# Altium PCB w43TrafficLight_PCB.PcbDoc
Units mil, origin at the board's own origin, x right, y up, seen from the top; angles counter-clockwise.
Board outline 6000 x 4000 mil, 2 copper layers (Top Layer, Bottom Layer); 41 components, 58 nets, 217 pads, 0 vias.
Unrouted connection lines stored in the file: 82.
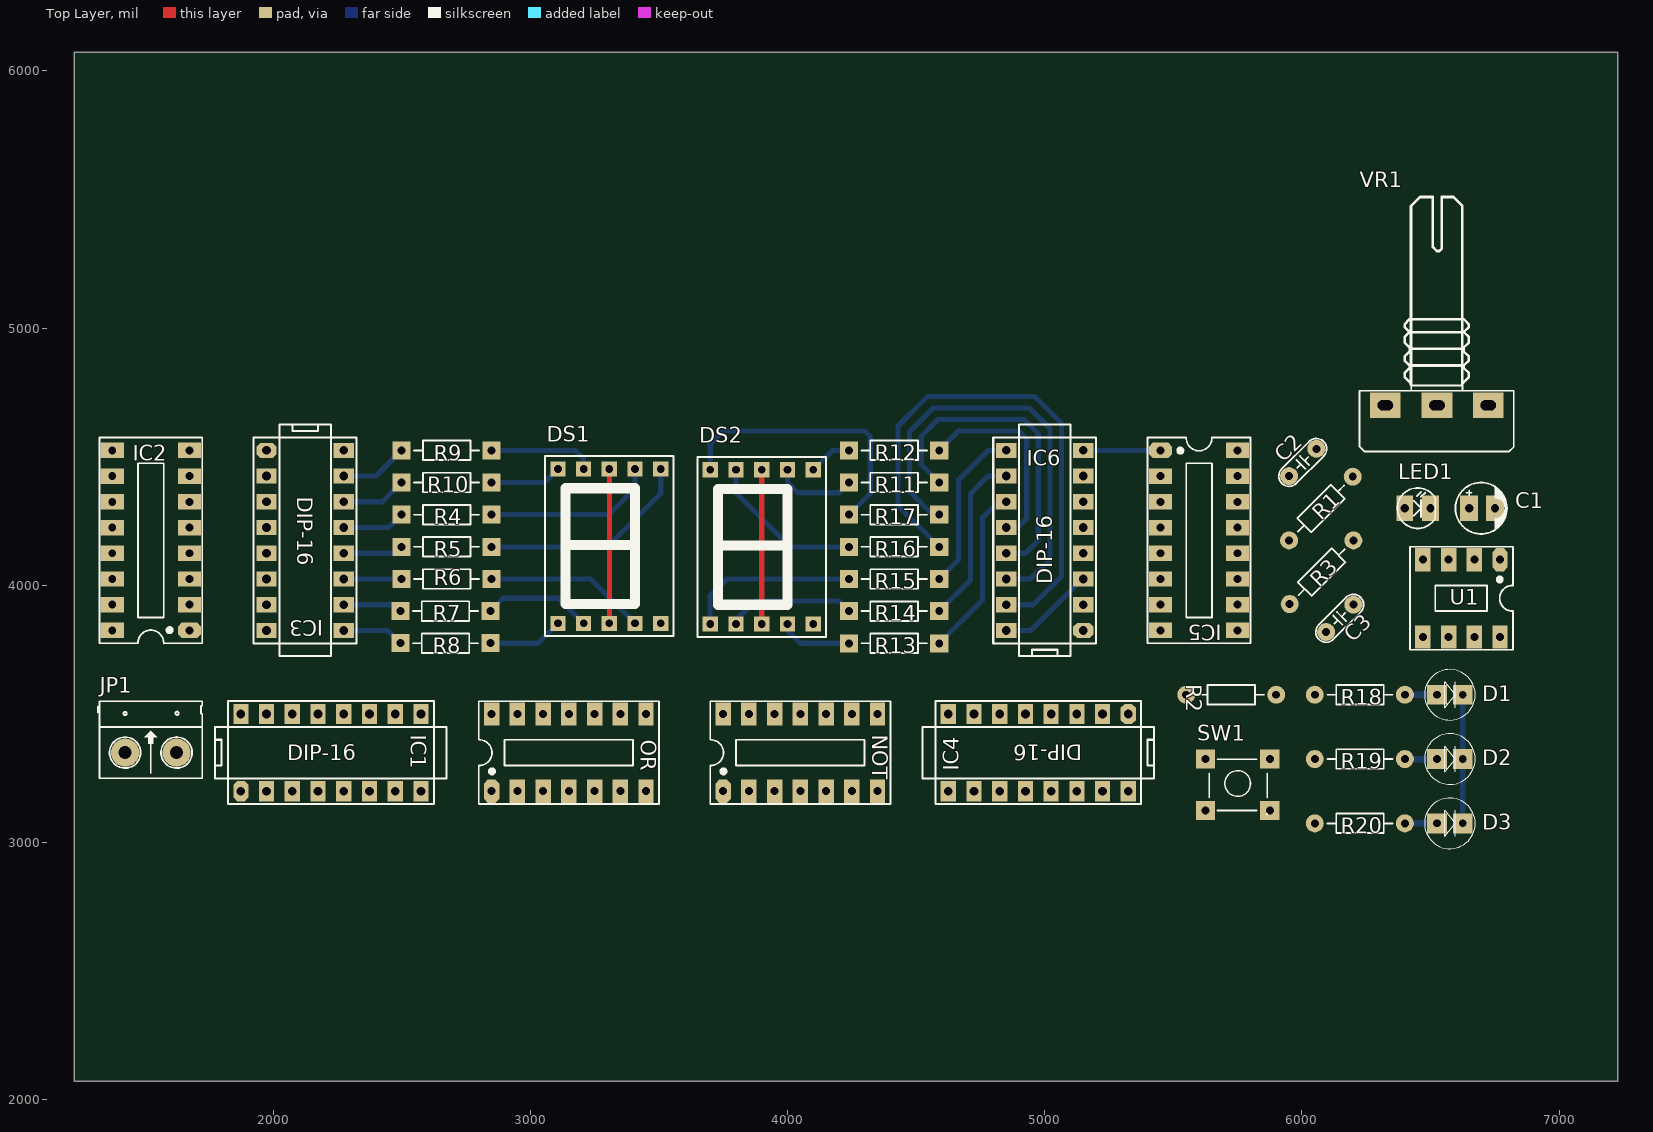
[diagram p0: Top Layer view]
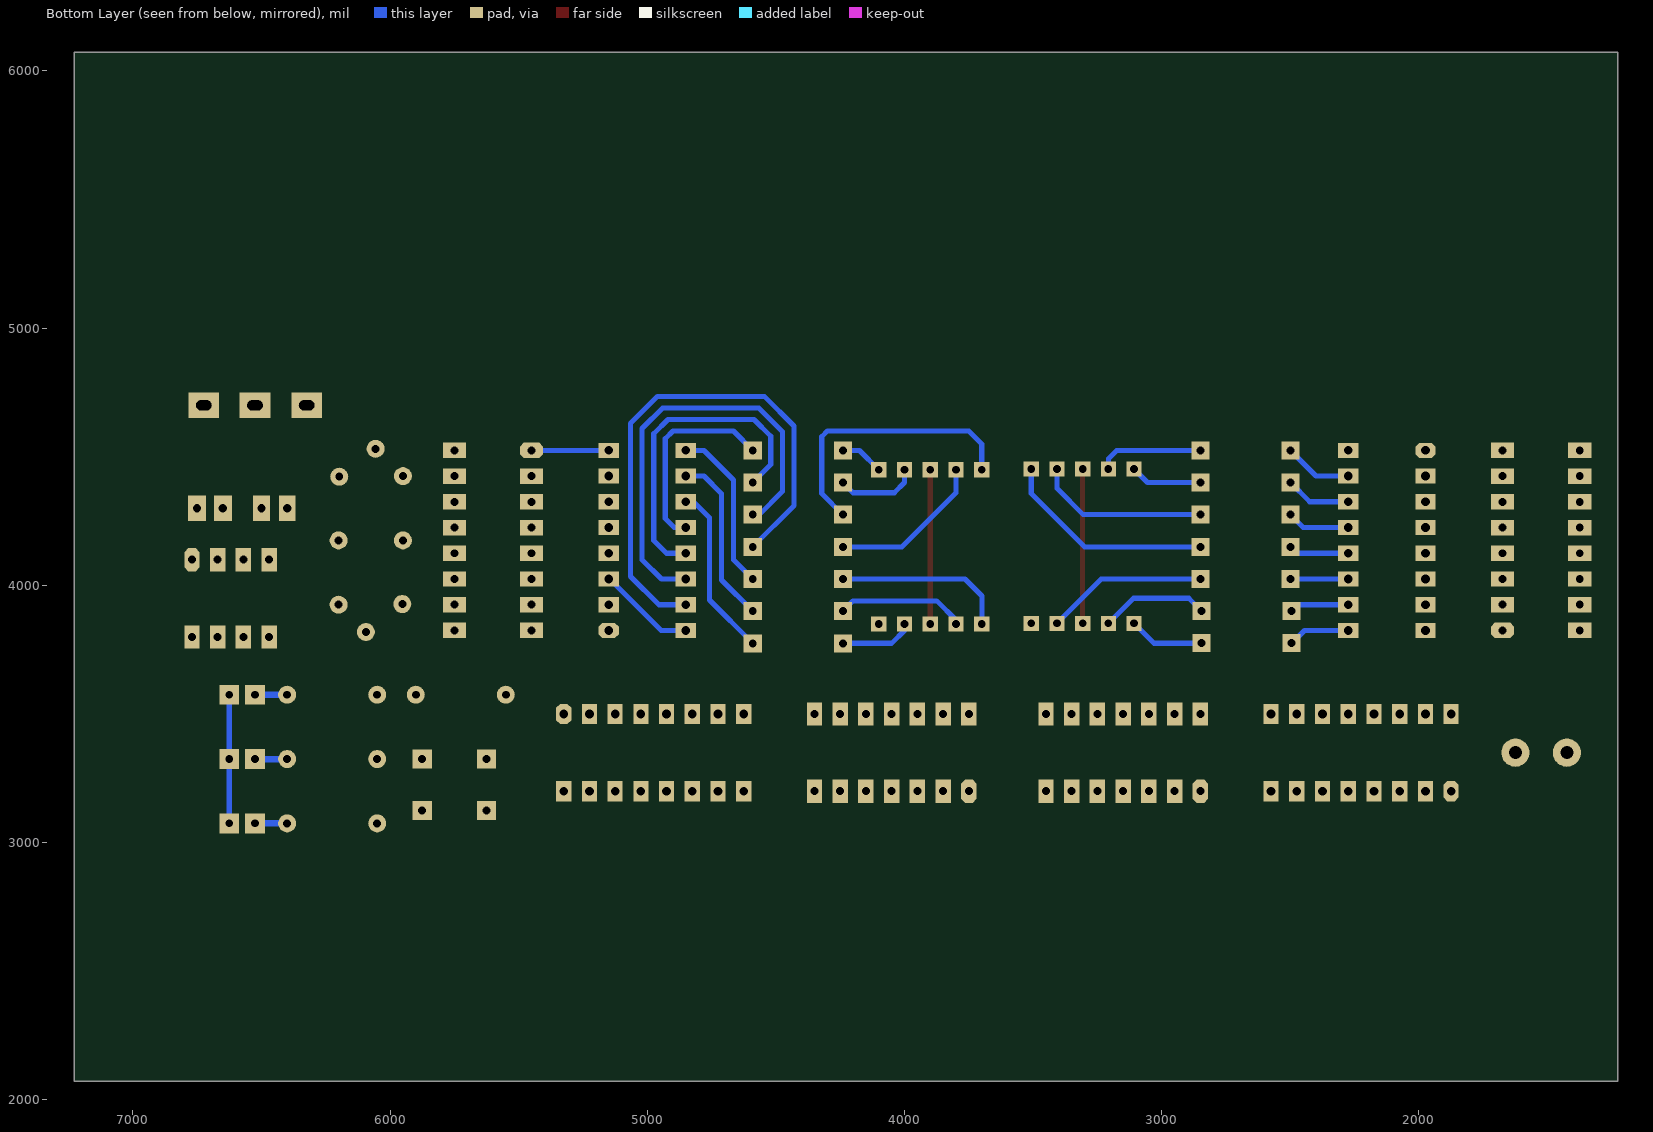
[diagram p1: Bottom Layer view, seen from below]

## Layer stack, top to bottom
Top Solder: solder mask 0.4, Solder Resist, Dk 3.5
Top Layer: signal copper 1.4
Dielectric 1: dielectric 12.6, FR-4, Dk 4.8
Bottom Layer: signal copper 1.4
Bottom Solder: solder mask 0.4, Solder Resist, Dk 3.5

## Board outline
1227.5,2072.5 7227.5,2072.5 7227.5,6072.5 1227.5,6072.5

## Design rules (kind name [scope] priority, off if disabled: settings)
Clearance [All] p1: gap=15 ignorepadtopadclearanceinfootprint=FALSE
PolygonConnect [All] p1: connectstyle=Relief reliefconductorwidth=10 reliefentries=4 polygonreliefangle="90 Angle" airgapwidth=10
RoutingLayers [All] p1: top layer_v5=FALSE bottom layer_v5=TRUE
RoutingVias [All] p1: holewidth=28 width=50 viastyle="Through Hole" minholewidth=28 minwidth=50 maxholewidth=28 maxwidth=50
SolderMaskExpansion [All] p1: expansion=4
Width [All] p1: maxlimit=30 minlimit=15 preferedwidth=20 toplayer_minwidth=20 bottomlayer_maxwidth=20 bottomlayer_prefwidth=15 minimp=50.000000 maximp=50.000000 favimp=50.000000
29 further rules are at their usual default settings.

## Classes and differential pairs
component class w43TrafficLight_schematic: C1 C2 C3 D1 D2 D3 DS1 IC1 IC2 IC3 IC4 IC5 IC6 JP1 LED1 NOT OR R1 R2 R3 R6 R8 R9 R10 R11 R12 R13 R14 R15 R16 R17 R18 R19 R20 SW1 U1 VR1

## Components (designator, comment, footprint, x,y, rotation, side; value= is the part's Value field where it differs from the comment)
C1 "Cap Pol" CP1/2 6650,4300 r0 top value=100pF
C2 "104" CN150 6003.03,4478.03 r45 top value=0.01uF
C3 "104" CN150 6146.97,3871.97 r45 top value=0.01uF
D1 "LED-RED-5MM" LED-5MM-RED 6525,3575 r0 top
D2 "LED-YELLOW-5MM" LED-5MM-YELLOW 6525,3325 r0 top
D3 "LED-GREEN-5MM" LED-5MM-GREEN 6525,3075 r0 top
DS1 "7SEG-A" LED7SEG 3306.5,4152.5 r0 top
DS2 "7SEG-A" LED7SEG 3899,4150 r0 top
IC1 "4017" DIP16 2225.29,3350.08 r0 top value=CD4017
IC2 "74193" DIP16/W0.3 1675,3825 r90 top
IC3 "7447" DIP16 2125.08,4174.71 r270 top value="7447 , 74247"
IC4 "4017" DIP16 4974.71,3349.92 r180 top value=CD4017
IC5 "74193" DIP16/W0.3 5450,4525 r270 top
IC6 "7447" DIP16 4999.92,4175.29 r90 top value="7447 , 74247"
JP1 "Header 2_1" HED2 1425,3350 r0 top value="Header 2"
LED1 "LED" LED-3MM-WHITE 6400,4300 r0 top value="LED 3 ly Single Colour"
NOT "7404" DIP14/W0.3 3750,3200 r0 top
OR "7432" DIP14/W0.3 2850,3200 r0 top
R1 "1k" R1/4W#1 5950,4175 r45 top value="R1/4W - 1K"
R2 "1k" R1/4W#1 5550,3575 r0 top value="R1/4W - 1K"
R3 "1k" R1/4W#1 5952.51,3927.51 r45 top value="R1/4W - 1K"
R4 "1k" R1/4W#2 2500,4275 r0 top value="R1/4W - 1K"
R5 "1k" R1/4W#2 2500,4150 r0 top value="R1/4W - 1K"
R6 "1k" R1/4W#2 2500,4025 r0 top value="R1/4W - 1K"
R7 "1k" R1/4W#2 2495.05,3900.24 r0 top value="R1/4W - 1K"
R8 "1k" R1/4W#2 2495.05,3775.24 r0 top value="R1/4W - 1K"
R9 "1k" R1/4W#2 2500,4525 r0 top value="R1/4W - 1K"
R10 "1k" R1/4W#2 2500,4400 r0 top value="R1/4W - 1K"
R11 "1k" R1/4W#2 4590,4400 r180 top value="R1/4W - 1K"
R12 "1k" R1/4W#2 4590,4525 r180 top value="R1/4W - 1K"
R13 "1k" R1/4W#2 4590,3775 r180 top value="R1/4W - 1K"
R14 "1k" R1/4W#2 4590,3900 r180 top value="R1/4W - 1K"
R15 "1k" R1/4W#2 4590,4025 r180 top value="R1/4W - 1K"
R16 "1k" R1/4W#2 4590,4150 r180 top value="R1/4W - 1K"
R17 "1k" R1/4W#2 4590,4275 r180 top value="R1/4W - 1K"
R18 "1k" R1/4W#1 6050,3575 r0 top value="R1/4W - 1K"
R19 "1k" R1/4W#1 6050,3325 r0 top value="R1/4W - 1K"
R20 "1k" R1/4W#1 6050,3075 r0 top value="R1/4W - 1K"
SW1 "SW" SW4 5625,3325 r0 top value="SW chip 4 pin"
U1 "NE555" DIP8 6625,3950 r180 top
VR1 "50K" VR-S1 6524,4700 r180 top value="Volume 50k"

## Footprints (in the part's own frame and the unit in brackets; to place one, negate y for a bottom-side part, rotate by r counter-clockwise, add the part's x,y. Pads: shape width x height; smd on the part's side, far side on the other; paste and mask are expansions set on the pad)
CN150 [mil]
  round 70 hole 31: 1(-75,0) 2(75,0)
  silkscreen extent -115,-40 115,40, body extent -115,-33 115,33, height 235
CP1/2 [mil] "Tu hoa < 22uF/16>50V"
  rect 70x100 hole 32: 1(0,0) 2(100,0)
  silkscreen extent -53,-100 147,100, body extent -49,-99 149,99, height 287
DIP8 [mil] "DIP, 8-Leads, Row Spacing 7.62mm, Pitch 2.54mm, Body 9.91x6.73mm"
  oct 60x90 hole 31: 1(-145,-150)
  rect 60x90 hole 31: 2(-45,-150) 3(55,-150) 4(155,-150) 5(155,150) 6(55,150) 7(-45,150) 8(-145,150)
  silkscreen extent -195,-200 205,200, body extent -213,-153 213,153, height 177
DIP14/W0.3 [mil] "14PIN, W 300mil, Pin to pin 100mil"
  oct 60x90 hole 31: 1(0,0)
  rect 60x90 hole 31: 2(100,0) 3(200,0) 4(300,0) 5(400,0) 6(500,0) 7(600,0) 8(600,300) 9(500,300) 10(400,300) 11(300,300) 12(200,300) 13(100,300) 14(0,300)
  silkscreen extent -50,-50 650,350, body extent -70,-12 680,302, height 145
DIP16 [mm]
  oct 1.5x2 hole 0.864: 1(-8.897,-3.812)
  rect 1.5x2 hole 0.864: 2(-6.357,-3.812) 3(-3.817,-3.812) 4(-1.277,-3.812) 5(1.263,-3.812) 6(3.803,-3.812) 7(6.343,-3.812) 8(8.883,-3.812) 9(8.883,3.808) 10(6.343,3.808) 11(3.803,3.808) 12(1.263,3.808) 13(-1.277,3.808) 14(-3.817,3.808) 15(-6.357,3.808) 16(-8.897,3.808)
  silkscreen extent -11.44,-5.08 11.42,5.08, body extent -10,-3.93 10,3.94, height 1.99
DIP16/W0.3 [mil] "16 PIN, W 300mil, Pin to pin 100mil"
  oct 60x90 hole 31: 1(0,0)
  rect 60x90 hole 31: 2(100,0) 3(200,0) 4(300,0) 5(400,0) 6(500,0) 7(600,0) 8(700,0) 9(700,300) 10(600,300) 11(500,300) 12(400,300) 13(300,300) 14(200,300) 15(100,300) 16(0,300)
  silkscreen extent -50,-50 750,350, body extent -52,-57 752,356, height 299
HED2 [mil] "Header 2, 2 pin, hight 300mil, Pin to Pin 200, Colour Green"
  round 110 hole 50: 1(0,0) 2(200,0)
  silkscreen extent -106,-100 300,200, body extent -92,-140 302,155, height 394
LED7SEG [mil] "LED7SEG"
  round 60 on Top Overlay: 0(186,-210)
  rect 59.06x59.06 hole 30: 1(-199,-300) 2(-99,-300) 3(1,-300) 4(101,-300) 5(201,-300) 6(201,300) 7(101,300) 8(1,300) 9(-99,300) 10(-199,300)
  silkscreen extent -249,-350 251,350, body extent -250,-375 250,375, height 316
LED-3MM-WHITE [mil] "LED 2 PIN, 3ly Only colour"
  rect 65x100 hole 32: 1(0,0) 2(100,0)
  silkscreen extent -29,-78 118,79, body extent -25,-75 113,75, height 217
LED-5MM-GREEN [mil]
  rect 77x77 hole 30: A(0,0) K(100,0)
  silkscreen extent -48,-98 148,98, body extent -54,-105 155,105, height 370
LED-5MM-RED [mil]
  rect 77x77 hole 30: A(0,0) K(100,0)
  silkscreen extent -48,-98 148,98, body extent -54,-105 155,105, height 370
LED-5MM-YELLOW [mil]
  rect 77x77 hole 30: A(0,0) K(100,0)
  silkscreen extent -48,-98 148,98, body extent -54,-105 155,105, height 370
R1/4W#1 [mil] "R 1/4W, 2 Pin, 350mil"
  round 70 hole 31: 1(0,0) 2(350,0)
  silkscreen extent 48,-38 302,38, body extent -40,-47 386,47, height 111
R1/4W#2 [mil] "R 1/4W, 2 Pin, 350mil"
  rect 70x70 hole 31: 1(0,0) 2(350,0)
  silkscreen extent 48,-38 302,38, body extent -40,-47 386,47, height 111
SW4 [mil] "SW button 4pin, 250 x250 mil"
  rect 75x75 hole 31: 1(0,0) 2(250,-200) 3(250,0) 4(0,-200)
  silkscreen extent 15,-215 240,0, body extent -36,-220 276,24, height 276
VR-S1 [mil]
  rect 120x100 hole 40 slot 60 at 0 deg: 1(-200,0) 2(-1,0) 3(200,0)
  silkscreen extent -299,-810 300,179, body extent -310,-818 310,188, height 839

## Part data
C1: "Polarized Capacitor (Radial)"
C2 C3: library part CN1.5, "Capacitor Ceramic"
DS1 DS2: library part LED7SEG-A, "14.2 mm General Purpose Blue 7-Segment Display: CA, RH DP, Gray Surface", Colour=Blue, PackageDocument=24-Sep-2002, ComponentLink1Description="Manufacturer Link", ComponentLink1URL=http://www.agilent.com/, DatasheetDocument=24-Sep-2002, LatestRevisionDate=17-Dec-2003, LatestRevisionNote="Schematic revised, PCB Footprint replaced.", MinimumIntensity="2020 ucd", Note="IF = 10 mA", PackageReference=H, Published=8-Jun-2000, Publisher="Altium Limited"
IC1 IC4: "Decade Counter/Divider with 10 Decoded Outputs", Designed by=VanDungEvn
IC2 IC5: "Synchronous 4-Bit Up/Down Counter", Copyright by=VanDungEvn@Gmail.com
IC3 IC6: "BCD to 7-Segment Decoder/Driver"
JP1: "Header, 2-Pin", Manufacturer="Generic Components", Class=Connector
LED1: "LED Single colour Green and Red"
NOT: "Hex Inverter", Code_IPC=SOIC127P600-14, ComponentLink1Description="Manufacturer Link", ComponentLink1URL=http://www.national.com/, ComponentLink2Description=Datasheet, ComponentLink2URL=http://www.fairchildsemi.com/ds/74/74F04.pdf
OR: "Quad 2-Input OR Gate"
R1 R2 R3 R4 R5 R6 R7 R8 R9 R10 R11 R12 R13 R14 R15 R16 R17 R18 R19 R20: library part R1/4W, "Resistor 1/4W"
SW1: library part SW4-1, "Switch button 4 pin"
U1: "TIMER IC", Current=200mA, Frequency=500kHz, Manufacturer=STMicroelectronics, Manufacturer Part Number=NE555DT, Operating Temperature="0°C ~ 70°C", Package / Case="8-SOIC (3.9mm Width)", Supplier Part Number=497-1962-2-ND, Voltage - Supply="4.5 V ~ 16 V", Category="Integrated Circuits (ICs)", Count=-, Packaging="Tape & Reel (TR)", RoHS="RoHS Compliant", Supplier=Digi-Key, Supplier 1=Digi-Key, Supplier Part Number 1=497-1962-2-ND, Type="555 Type, Timer/Oscillator (Single)"
VR1: library part VR-S, "Var Resistor"

## Nets (pads, with @x,y where several pads share a name; then routed paths per layer and width w, separated by ;. In a path a pad name is that pad's centre, name@x,y a point inside that pad or via, vN(x,y) a via of type N, cw(c..) or ccw(c..) an arc to the next point about the centre after c; other vN are vias at no path point)
GND: C1.2 C3.1 D1.K D2.K D3.K IC1.8 IC1.13 IC2.8 IC2.9 IC2.10 IC3.8 IC4.8 IC4.13 IC5.1 IC5.8 IC5.9 IC6.8 JP1.1 LED1.2 NOT.7 OR.7 R3.1 U1.1 | length 825
  Bottom Layer w20: IC6.8 IC5.1@5475,4525 ; D3.K D2.K D1.K
NetC1_1: C1.1 U1.2 U1.6 VR1.3
NetC3_2: C3.2 U1.5
NetD1_A: D1.A R18.2 | length 125
  Bottom Layer w25: R18.2 D1.A
NetD2_A: D2.A R19.2 | length 125
  Bottom Layer w25: R19.2 D2.A
NetD3_A: D3.A R20.2 | length 125
  Bottom Layer w25: R20.2 D3.A
NetDS1_1: DS1.1 R8.2 | length 294.5
  Bottom Layer w20: R8.2 3030.24,3775.24 DS1.1
NetDS1_2: DS1.2 R7.2 | length 423.4
  Bottom Layer w20: R7.2 2894.8,3950 3110,3950 DS1.2
NetDS1_4: DS1.4 R6.2 | length 629
  Bottom Layer w20: R6.2 3235,4025 DS1.4
NetDS1_6: DS1.6 R5.2 | length 838.4
  Bottom Layer w20: R5.2 3300,4150 3507.5,4357.5 DS1.6
NetDS1_7: DS1.7 R4.2 | length 675
  Bottom Layer w20: R4.2 3305,4275 3407.5,4377.5 DS1.7
NetDS1_9: DS1.9 R9.2 | length 411
  Bottom Layer w20: R9.2 3175,4525 3207.5,4492.5 DS1.9
NetDS1_10: DS1.10 R10.2 | length 279.2
  Bottom Layer w20: R10.2 3055,4400 DS1.10
NetDS2_1: DS2.1 R15.2 | length 677.8
  Bottom Layer w20: DS2.1 3699,3851 3699,3959 3765,4025 R15.2
NetDS2_2: DS2.2 R14.2 | length 502.6
  Bottom Layer w20: DS2.2 3800,3865 3875,3940 4200,3940 R14.2
NetDS2_4: DS2.4 R13.2 | length 285.7
  Bottom Layer w20: DS2.4 4000,3825 4050,3775 R13.2
NetDS2_6: DS2.6 R12.2 | length 171.1
  Bottom Layer w20: DS2.6 4175,4525 R12.2
NetDS2_7: DS2.7 R11.2 | length 323.1
  Bottom Layer w20: DS2.7 4000,4400 4040,4360 4200,4360 R11.2
NetDS2_9: DS2.9 R16.2 | length 617
  Bottom Layer w20: DS2.9 3800,4360 4010,4150 R16.2
NetDS2_10: DS2.10 R17.2 | length 1088.8
  Bottom Layer w20: DS2.10 3700,4550 3750,4600 4300,4600 4322,4578 4322,4357 R17.2
NetIC1_2: IC1.2 OR.2
NetIC1_3: IC1.3 OR.1
NetIC1_7: IC1.7 IC1.15
NetIC1_14: IC1.14 IC2.11 IC2.13 IC4.14 IC5.11
NetIC2_1: IC2.1 IC2.15 OR.3
NetIC2_2: IC2.2 IC3.1
NetIC2_3: IC2.3 IC3.7
NetIC2_4: IC2.4 IC5.13
NetIC2_6: IC2.6 IC3.2
NetIC2_7: IC2.7 IC3.6
NetIC3_9: IC3.9 R8.1 | length 240.7
  Bottom Layer w20: IC3.9 2445.29,3825 R8.1
NetIC3_10: IC3.10 R7.1 | length 230.3
  Bottom Layer w20: IC3.10 2470.29,3925 R7.1
NetIC3_11: IC3.11 R6.1 | length 225
  Bottom Layer w20: IC3.11 R6.1
NetIC3_12: IC3.12 R5.1 | length 235.4
  Bottom Layer w20: IC3.12 2475,4125 R5.1
NetIC3_13: IC3.13 R4.1 | length 245.7
  Bottom Layer w20: IC3.13 2450,4225 R4.1
NetIC3_14: IC3.14 R10.1 | length 256.1
  Bottom Layer w20: IC3.14 2425,4325 R10.1
NetIC3_15: IC3.15 R9.1 | length 266.4
  Bottom Layer w20: IC3.15 2400,4425 R9.1
NetIC4_2: IC4.2 R18.1
NetIC4_3: IC4.3 NOT.1 R19.1
NetIC4_4: IC4.4 R20.1
NetIC4_7: IC4.7 IC4.15
NetIC5_2: IC5.2 IC6.1
NetIC5_3: IC5.3 IC6.7
NetIC5_6: IC5.6 IC6.2
NetIC5_7: IC5.7 IC6.6
NetIC5_10: IC5.10 IC5.15 NOT.2
NetIC6_9: IC6.9 R15.1 | length 648.7
  Bottom Layer w20: R15.1 4665,4100 4665,4410 4780,4525 IC6.9
NetIC6_10: IC6.10 R14.1 | length 673.7
  Bottom Layer w20: R14.1 4711.41,4021.41 4711.41,4356.41 4780,4425 IC6.10
NetIC6_11: IC6.11 R13.1 | length 675.3
  Bottom Layer w20: R13.1 4757.81,3942.81 4757.81,4262.81 4820,4325 IC6.11
NetIC6_12: IC6.12 R12.1 | length 788
  Bottom Layer w20: R12.1 4665,4600 4900,4600 4930,4570 4930,4260 4895,4225 IC6.12
NetIC6_13: IC6.13 R11.1 | length 1274.4
  Bottom Layer w20: R11.1 4520,4470 4520,4580 4585,4645 4920,4645 4975,4590 4975,4175 4925,4125 IC6.13
NetIC6_14: IC6.14 R17.1 | length 1712.8
  Bottom Layer w20: R17.1 4565,4275 4475,4365 4475,4598.43 4566.57,4690 4940,4690 5020,4610 5020,4100 4945,4025 IC6.14
NetIC6_15: IC6.15 R16.1 | length 2118
  Bottom Layer w20: R16.1 4430,4310 4430,4620 4545,4735 4960,4735 5065,4630 5065,4035 4955,3925 IC6.15
NetLED1_1: LED1.1 R2.1
NetR1_1: R1.1 U1.7 VR1.1 VR1.2
RST: C2.1 IC2.14 IC5.14 R3.2 SW1.2 SW1.4
VCC: C2.2 DS1.3 DS1.8 DS2.3 DS2.8 IC1.16 IC2.5 IC2.16 IC3.3 IC3.4 IC3.5 IC3.16 IC4.16 IC5.5 IC5.16 IC6.3 IC6.4 IC6.5 IC6.16 JP1.2 NOT.14 OR.14 R1.2 SW1.1 SW1.3 U1.4 U1.8 | length 1582.8
  Top Layer w20: DS1.3 DS1.8 ; DS2.3 DS2.8
  Bottom Layer w20: IC6.16 4945.75,3825 5145.75,4025 IC6.3
ZZZ: IC5.4 R2.2 U1.3
pads on no net: DS1.0 DS1.5 DS2.0 DS2.5 IC1.1 IC1.4 IC1.5 IC1.6 IC1.9 IC1.10 IC1.11 IC1.12 IC2.12 IC4.1 IC4.5 IC4.6 IC4.9 IC4.10 IC4.11 IC4.12 IC5.12 NOT.3 NOT.4 NOT.5 NOT.6 NOT.8 NOT.9 NOT.10 NOT.11 NOT.12 NOT.13 OR.4 OR.5 OR.6 OR.8 OR.9 OR.10 OR.11 OR.12 OR.13

## Text inside footprints (layer, text, board x,y; h text height)
IC1: Top Overlay "DIP-16" at 2055,3320 h59.05
IC3: Top Overlay "DIP-16" at 2095,4345 h59.05 r270
IC4: Top Overlay "DIP-16" at 5145,3380 h59.05 r180
IC6: Top Overlay "DIP-16" at 5030,4005 h59.05 r90